# Altium PCB Touch_6Buttons_Wheel_Flex.PcbDoc
Units mm, origin at the board's own origin, x right, y up, seen from the top; angles counter-clockwise.
Board outline 66.55 x 48 mm, 2 copper layers (Top Layer, Bottom Layer), stack 0.104 mm thick; 1 components, 7 nets, 6 pads, 0 vias.
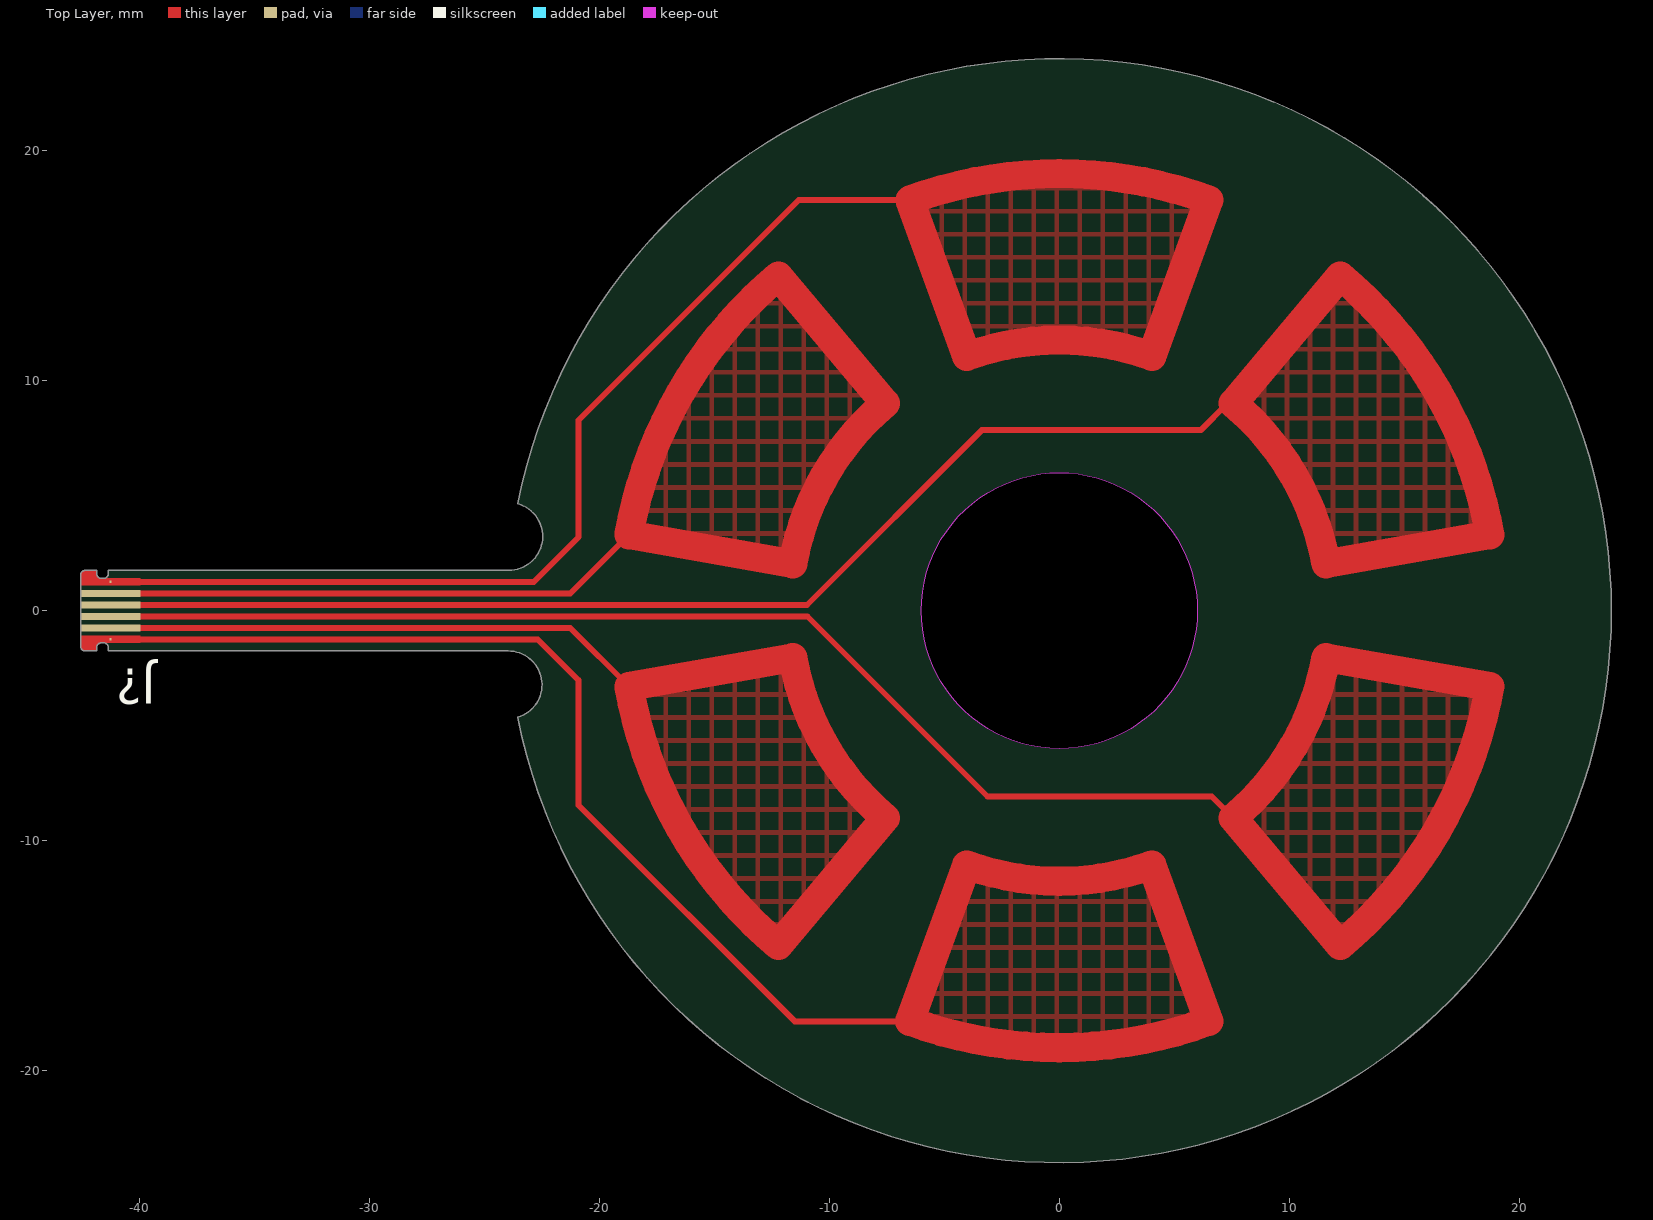
[diagram p0: Top Layer view]
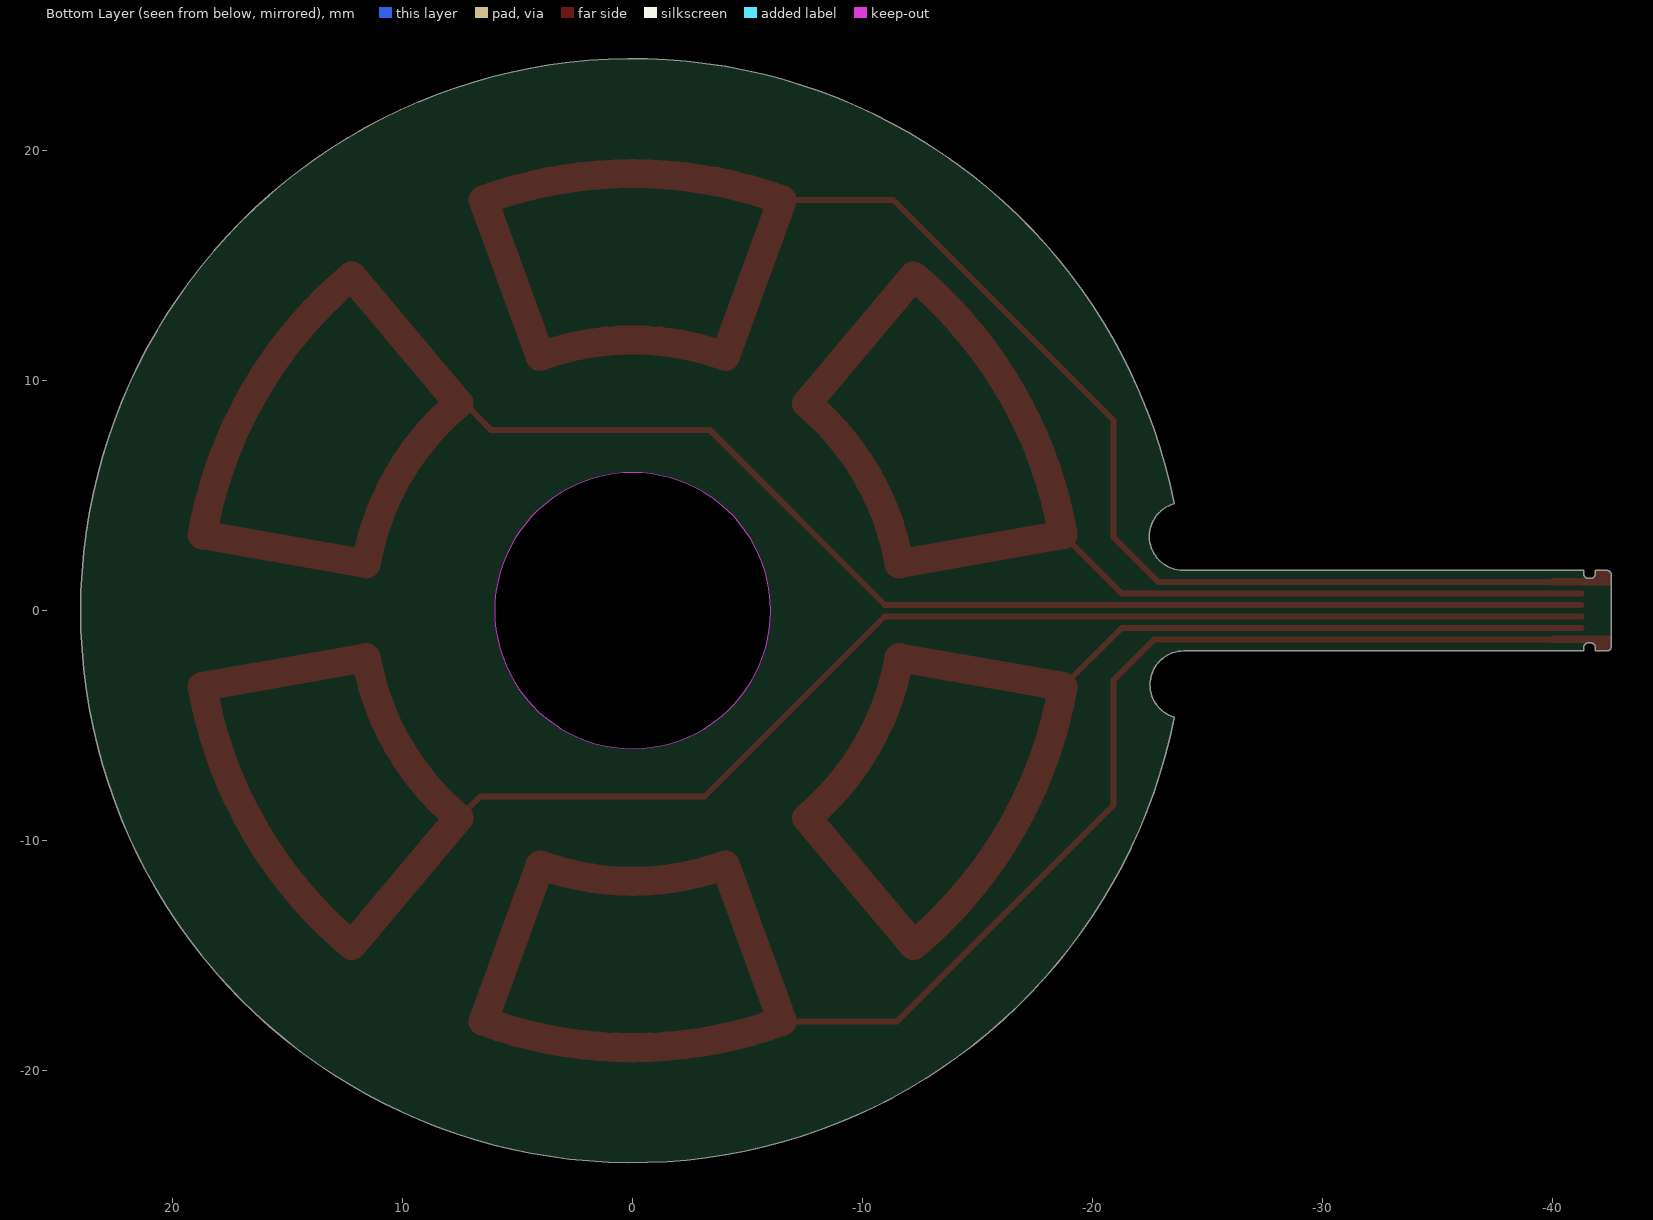
[diagram p1: Bottom Layer view, seen from below]

## Layer stack, top to bottom
Top Solder: solder mask 0.0508, Solder Resist, Dk 3.5
Top Layer: signal copper 0.0178
Dielectric 1: core 0.0864, Polyimide, Dk 0
Bottom Layer: signal copper (thickness not stored)

## Board outline
-42.35,-1.75 cw(c-42.35,-1.55) -42.55,-1.55 -42.55,1.55 cw(c-42.35,1.55) -42.35,1.75 -41.85,1.75 -41.85,1.6 ccw(c-41.65,1.6) -41.65,1.4 -41.548,1.4 ccw(c-41.548,1.6) -41.348,1.6 -41.348,1.75 -23.936,1.75 ccw(c-23.936,3.225) -23.521,4.64 -23.546,4.645 cw(c0,0) -23.547,-4.639 -23.551,-4.639 ccw(c-23.966,-3.225) -23.966,-1.75 -41.348,-1.75 -41.348,-1.6 ccw(c-41.548,-1.6) -41.548,-1.4 -41.65,-1.4 ccw(c-41.65,-1.6) -41.85,-1.6 -41.85,-1.75
cut-out: 0,-6 cw(c0,0) -6,0 cw(c0,0) 0,6 cw(c0,0) 6,0 cw(c0,0)

## Design rules (kind name [scope] priority, off if disabled: settings)
AcuteAngle [All] p1: minimum=6.00000000000000E+0001 checktracksonly=FALSE
BoardOutlineClearance [All] p1: gap=0.381
Clearance Clearance_CAPIN1 [InNamedPolygon('NONET_L01_P002') vs InNet('CAPIN1')] p1: gap=2.5
Clearance Clearance_CAPIN2 [InNamedPolygon('NONET_L01_P002') vs InNet('CAPIN2')] p2: gap=2.5
Clearance [All] p3: gap=0.152
FanoutControl Fanout_LCC [IsLCC] p1: bgadir=Out bgaviamode=Centered fanoutstyle=Auto fanoutdirection=Alternating viagrid=0.025 // Fanout_LCC (Default Rule)
FanoutControl Fanout_BGA [IsBGA] p2: bgadir=Out bgaviamode=Centered fanoutstyle=Auto fanoutdirection=Alternating viagrid=0.025 // Fanout_BGA (Default Rule)
FanoutControl Fanout_Default [All] p4: bgadir=Out bgaviamode=Centered fanoutstyle=Auto fanoutdirection=Alternating viagrid=0.025 // Fanout_Default (Default Rule)
FanoutControl Fanout_Small [(CompPinCount < 5)] p5: bgadir=Out bgaviamode=Centered fanoutstyle=Auto fanoutdirection=OutThenIn viagrid=0.025 // Fanout_Small (Default Rule)
Height Height_TOP [OnLayer('Top Layer')] p2: minheight=0 maxheight=3 prefheight=1
Height Height_BOT [OnLayer('Bottom Layer')] p3: minheight=0 maxheight=20 prefheight=3
HoleSize [All] p1: absolutevalues=TRUE maxlimit=2.54 minlimit=0.33 maxpercent=80.000 minpercent=20.000
HoleToHoleClearance [All] p1: gap=0.152 allowstackedmicrovias=TRUE
MinimumAnnularRing [All] p1: minimumring=0.178
MinimumSolderMaskSliver [All] p1: minsoldermaskwidth=0.102
PolygonConnect [All] p1: connectstyle=Relief reliefconductorwidth=0.254 reliefentries=4 polygonreliefangle="90 Angle" airgapwidth=0.254
RoutingVias [All] p1: holewidth=0.33 width=0.686 viastyle="Through Hole" minholewidth=0.33 minwidth=0.686 maxholewidth=0.711 maxwidth=1.27
SilkToBoardRegionClearance SilkToBoardRegionClearance_1 [All] p2:
SolderMaskExpansion [All] p1: expansion=0.102
Width Width_VBAT [InNet('VBAT')] p1: maxlimit=1.27 minlimit=0.203 preferedwidth=0.305
Width Width_BATSENSE [InNet('BAT_SENSE')] p2: maxlimit=1.27 minlimit=0.203 preferedwidth=0.305
Width Width_VCC [InNet('VCC')] p3: maxlimit=1.27 minlimit=0.203 preferedwidth=0.305
Width Width_GND [InNet('GND')] p4: maxlimit=0.508 minlimit=0.203 preferedwidth=0.305
Width [All] p5: maxlimit=0.254 minlimit=0.152 preferedwidth=0.203
23 further rules are at their usual default settings.

## Components (designator, comment, footprint, x,y, rotation, side; value= is the part's Value field where it differs from the comment)
J? "FLEX-FCI59453061110ECHLF" FLEX-FCI5945306111CHLF -41.25,0 r180 top

## Footprints (in the part's own frame and the unit in brackets; to place one, negate y for a bottom-side part, rotate by r counter-clockwise, add the part's x,y. Pads: shape width x height; smd on the part's side, far side on the other; paste and mask are expansions set on the pad)
FLEX-FCI5945306111CHLF [mm] "Flex male connector for FCI59453-06111CHLF socket, 6 pins, 2.6 x 0.3 mm pads, 0.5 mm pitch"
  rect 0.1x0.1 smd paste-0.1 mask-0.1: 1(0,1.25) 6(0,-1.25)
  rect 2.6x0.3 smd paste-0.3 mask+0.051: 2(0,0.75) 3(0,0.25) 4(0,-0.25) 5(0,-0.75)
  Top Layer region: -1.3,1.4 0.4,1.4 0.4,1.4 0.477,1.415 0.541,1.459 0.585,1.523 0.6,1.6 0.6,1.6 0.6,1.75 1.1,1.75 1.177,1.735 1.241,1.691 1.285,1.627 1.3,1.55 1.3,1.55 1.3,1.1 -1.3,1.1
  Top Layer region: -1.3,-1.4 0.4,-1.4 0.4,-1.4 0.477,-1.415 0.541,-1.459 0.585,-1.523 0.6,-1.6 0.6,-1.6 0.6,-1.75 1.1,-1.75 1.177,-1.735 1.241,-1.691 1.285,-1.627 1.3,-1.55 1.3,-1.55 1.3,-1.1 -1.3,-1.1
  body extent -2.2,-1.75 1.3,1.75, height 0.2

## Part data
J?: "Flex Connector, to connect to FPC, 0.5 mm pitch, 6 contacts"

## Nets (pads, with @x,y where several pads share a name; then routed paths per layer and width w, separated by ;. In a path a pad name is that pad's centre, name@x,y a point inside that pad or via, vN(x,y) a via of type N, cw(c..) or ccw(c..) an arc to the next point about the centre after c; other vN are vias at no path point)
CAPIN: 
CAPIN1: J?.1 | length 80.8
  Top Layer w0.254: J?.1@-41.246,-1.25 -22.675,-1.25 -20.904,-3.021 -20.904,-8.458 -11.506,-17.856 -6.499,-17.856
  Top Layer w1.27: -6.499,-17.856 -4.025,-11.058 ccw(c0,0) 4.025,-11.058 6.498,-17.854 cw(c0,0) -6.498,-17.854
CAPIN2: J?.2 | length 59.5
  Top Layer w0.254: J?.2@-41.246,-0.75 -21.261,-0.75 -18.711,-3.299
  Top Layer w1.27: -18.711,-3.299 ccw(c0,0) -12.213,-14.555 -7.564,-9.014 cw(c0,0) -11.588,-2.043 -18.711,-3.299
CAPIN3: J?.3 | length 88.4
  Top Layer w0.254: J?.3@-41.246,-0.25 -10.951,-0.25 -3.124,-8.077 6.627,-8.077 7.564,-9.014
  Top Layer w1.27: 7.564,-9.014 ccw(c0,0) 11.588,-2.043 18.711,-3.299 cw(c0,0) 12.213,-14.555 7.564,-9.014
CAPIN4: J?.4 | length 88.4
  Top Layer w0.254: J?.4@-41.246,0.25 -10.975,0.25 -3.376,7.849 6.147,7.849 7.312,9.014 7.564,9.014
  Top Layer w1.27: 7.564,9.014 cw(c0,0) 11.588,2.043 18.711,3.299 ccw(c0,0) 12.213,14.555 7.564,9.014
CAPIN5: J?.5 | length 59.5
  Top Layer w0.254: J?.5@-41.246,0.75 -21.261,0.75 -18.711,3.299
  Top Layer w1.27: -18.711,3.299 cw(c0,0) -12.213,14.555 -7.564,9.014 ccw(c0,0) -11.588,2.043 -18.703,3.298
CAPIN6: J?.6 | length 80.5
  Top Layer w0.254: J?.6@-41.246,1.25 -22.85,1.25 ; -22.833,1.267 -20.904,3.196 -20.904,8.28 -11.33,17.854 -6.498,17.854
  Top Layer w1.27: -6.498,17.854 cw(c0,0) 6.498,17.854 4.025,11.058 ccw(c0,0) -4.025,11.058 -6.498,17.854

## Polygon pours and split planes (outlines as drawn)
CAPIN4 on Top Layer "Pour CAPIN4" (hatched 90Degree grid 1 track 0.2, remove dead copper, pour order 10): 11.588,2.043 ccw(c0,0) 7.564,9.014 12.213,14.555 cw(c0,0) 18.711,3.299
CAPIN3 on Top Layer "Pour CAPIN3" (hatched 90Degree grid 1 track 0.2, remove dead copper, pour order 8): 7.564,-9.014 12.213,-14.555 ccw(c0,0) 18.711,-3.299 11.588,-2.043 cw(c0,0)
CAPIN1 on Top Layer "Pour CAPIN1" (hatched 90Degree grid 1 track 0.2, remove dead copper, pour order 6): -6.498,-17.854 ccw(c0,0) 6.498,-17.854 4.025,-11.058 cw(c0,0) -4.025,-11.058
CAPIN2 on Top Layer "Pour CAPIN2" (hatched 90Degree grid 1 track 0.2, remove dead copper, pour order 4): -12.213,-14.555 cw(c0,0) -18.711,-3.299 -11.588,-2.043 ccw(c0,0) -7.564,-9.014
CAPIN5 on Top Layer "Pour CAPIN5" (hatched 90Degree grid 1 track 0.2, remove dead copper, pour order 2): -18.703,3.298 -11.588,2.043 cw(c0,0) -7.564,9.014 -12.213,14.555 ccw(c0.006,0.011)
CAPIN6 on Top Layer "Pour CAPIN6" (hatched 90Degree grid 1 track 0.2, remove dead copper, pour order 0): -4.025,11.058 -6.498,17.854 cw(c0,0) 6.498,17.854 4.025,11.058 ccw(c0,0)

## Silkscreen, mask and mechanical layers (free items; w line width, h text height)
Outline:
  circle w0.1: c0,0 r6
  lines w0.1: -41.55,-1.4 -41.65,-1.4 ccw(c-41.65,-1.6) -41.85,-1.6 -41.85,-1.75 -42.35,-1.75 cw(c-42.35,-1.55) -42.55,-1.55 -42.55,1.55 cw(c-42.35,1.55) -42.35,1.75 -41.85,1.75 -41.85,1.6 ccw(c-41.65,1.6) -41.65,1.4 -41.55,1.4 ; -41.548,-1.4 cw(c-41.548,-1.6) -41.348,-1.6 -41.348,-1.75 -23.966,-1.75 cw(c-23.966,-3.225) -23.551,-4.639 ; -41.548,1.4 ccw(c-41.548,1.6) -41.348,1.6 -41.348,1.75 -23.936,1.75 ccw(c-23.936,3.225) -23.521,4.64 ; -23.547,-4.639 ccw(c0,0) -23.546,4.645
Mechanical 3:
  lines w0.254: -30.914,37.649 -30.914,39.449 -26.914,39.449 -26.914,37.649 ; -2.464,37.649 -2.464,39.449 1.536,39.449 1.536,37.649 ; 23.536,46.549 23.536,47.549 ; 25.986,37.649 25.986,39.449 29.986,39.449 29.986,37.649 ; -31.714,37.649 -31.714,46.549 30.786,46.549 30.786,37.649 ; -31.714,37.649 30.786,37.649 ; -31.714,37.649 -31.714,33.199 30.786,33.199 30.786,37.649 ; 23.536,47.549 30.786,47.549 30.786,51.999 -31.714,51.999 -31.714,47.549 -24.464,47.549 23.536,47.549
Mechanical 4:
  lines w0.254: -59.464,37.649 -31.664,37.649 ; -59.414,47.574 -31.664,47.574 ; -36.239,40.399 -31.739,40.399 ; -36.164,34.449 -31.839,34.449 ; -35.814,44.449 -24.464,46.999 ; -35.589,51.999 -24.514,49.174 ; -29.255,37.004 -29.254,32.292 -27.58,30.321 32.583,30.321 37.511,35.249 ; -22.864,33.924 -17.164,53.999 ; 2.261,38.549 35.386,36.624 ; 23.536,47.024 32.736,46.999 ; 30.536,38.424 35.311,37.199
  text "ASSEMBLY DRAWING (NOT TO SCALE)" at -25.214,61.949 h2
  text "FPC CONNECTOR" at -27.864,55.049 h2
  text "1.5mm" at -45.239,51.399 h2
  text "POLYCARBONATE LENS" at -15.639,48.599 h2
  text "FLEX (ELECTRODE)" at 33.186,45.899 h2
  text "0.1778mm" at -50.489,43.799 h2
  text "3.35mm" at -64.314,41.924 h2
  text "OPTICAL LENS" at -10.464,41.074 h2
  text "3.348mm" at -49.314,39.799 h2
  text "LEDS" at 36.261,36.374 h2
  text "MAIN PCB" at -8.664,34.449 h2
  text "1.7272mm" at -52.064,33.824 h2
Mechanical 5:
  lines w0.254: -21.121,31.814 cw(c-21.121,30.909) -20.481,31.549 ccw(c-20.038,33.204) -18.324,33.204 -18.324,46.349 cw(c-18.124,46.349) -18.124,46.549 23.536,46.549 23.536,47.549 -18.124,47.549 ; -19.324,33.204 -19.324,46.354 cw(c-18.124,46.354) -18.124,47.554 ; -19.324,33.248 cw(c-20.053,33.248) -20.569,32.732 ccw(c-21.209,32.092) -21.209,32.997 ; -21.209,32.997 -21.209,31.207 -25.659,31.207 -25.659,32.997 -21.209,32.997
Dimensions Top:
  lines w0.254: -34.941,3.285 -34.411,1.769 ; -34.847,-3.262 -34.361,-1.731 ; -34.665,1.765 -34.157,1.773 ; -34.615,-1.735 -34.107,-1.727 ; -34.447,4.309 -34.411,1.769 ; -34.325,-4.271 -34.361,-1.731 ; -33.925,3.3 -34.411,1.769 ; -33.831,-3.248 -34.361,-1.731
  text "3.5 (mm)" at -38.121,5.451 h1.52 r270.82

## Dimensions
0,-6 to -42.55,-1.55 on Dimensions Top
-23.936,3.225 to -15.487,11.673 on Dimensions Top
0,0 to 28.067,-17.145 on Dimensions Top
0,0 to 39.025,2.725 on Dimensions Top